# EAGLE board PCB_Gabri1.1.1 (EAGLE 8.6.3)
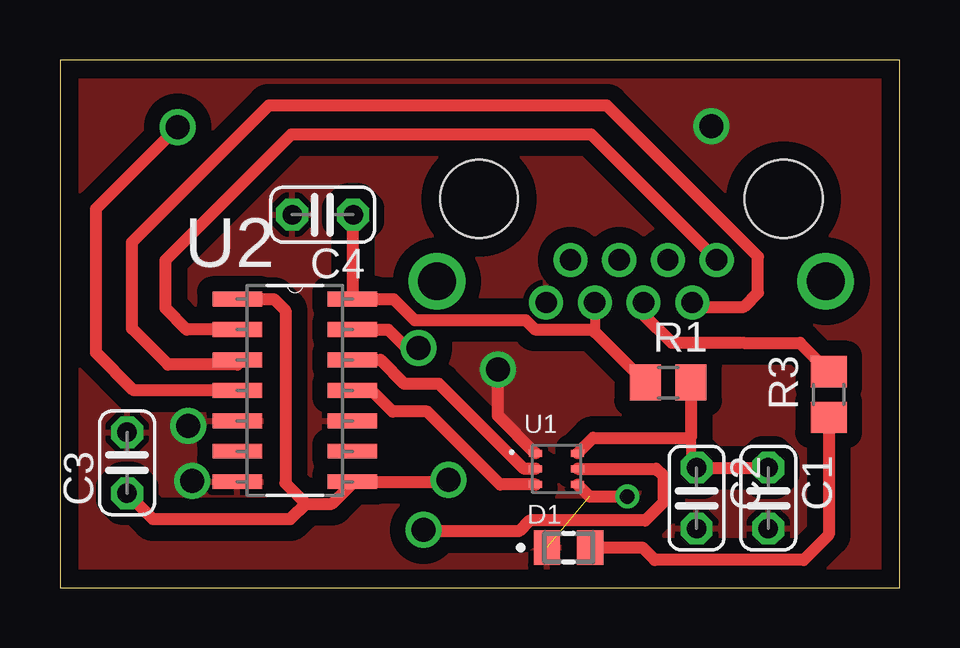
[diagram p0: board, top side]
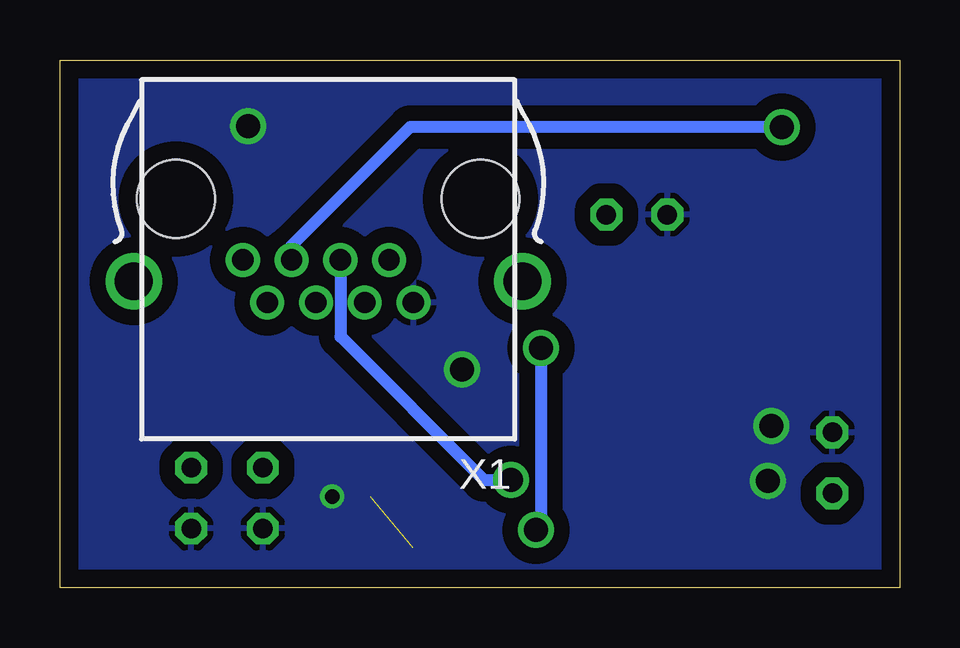
[diagram p1: board, bottom side, seen from below]

Size 35 x 22 mm. Coordinates in mm from the lower left corner, seen from the top.
Outline: 0,0 35,0 35,22 0,22 0,0
Copper layers (1*16): Top 0.035mm / dielectric 1.5mm / Bottom 0.035mm
Design rules "default *": minimum track width 10mil, minimum drill 0.5mm, track to track 0.65mm, track to pad 8mil, pad to pad 8mil, via to via 8mil, smd to smd 8mil, copper to edge 30mil, drill to drill 8mil, minimum pad ring 10mil, minimum via ring 8mil, stop-mask expansion 4mil, vias tented up to drill 0mil, thermal gap 10mil

## Footprints (pad centres in the part's own frame; a part is rotated, then mirrored left to right if it is on the bottom)
C025-024X044 = drill 0.813 octagon: 1 -1.27,0; 2 1.27,0
LEDC2012X70N = smd 1.1 x 1.45: A 0.9,0; C -0.9,0
R0805 = smd 1.3 x 1.5: 1 -0.95,0; 2 0.95,0
VISHAY_VEML6030_2X2X0.87 = smd 0.55 x 0.3: 1 -0.875,0.65; 2 -0.875,0; 3 -0.875,-0.65; 4 0.875,-0.65; 5 0.875,0; 6 0.875,0.65
SOIC127P600X175-14N = smd 2.057 x 0.61: 1 -4.801,7.62; 2 -4.801,6.35; 3 -4.801,5.08; 4 -4.801,3.81; 5 -4.801,2.54; 6 -4.801,1.27; 7 -4.801,0; 8 0,0; 9 0,1.27; 10 0,2.54; 11 0,3.81; 12 0,5.08; 13 0,6.35; 14 0,7.62
0446200002 = drill 0.889 pad 1.422: 1 3.556,2.54; 2 2.54,4.318; 3 1.524,2.54; 4 0.508,4.318; 5 -0.508,2.54; 6 -1.524,4.318; 7 -2.54,2.54; 8 -3.556,4.318 | drill 1.575 pad 2.286: S@1 -8.103,3.429; S@2 8.103,3.429 | hole 3.251: 6.35,0; -6.35,0

## Placement (x,y rotation side)
C1  [C025-024X044]  29.53,3.73 270 top
C2  [C025-024X044]  26.54,3.73 270 top
C3  [C025-024X044]  2.8,5.2 90 top
C4  [C025-024X044]  10.95,15.55 180 top
D1  5988170107F  [LEDC2012X70N]  21.2,1.67 0 top
R1  [R0805]  25.35,8.55 0 top
R3  [R0805]  32.05,8.05 90 top
U1  VEML6030  [VISHAY_VEML6030_2X2X0.87]  20.7,4.95 0 top
U2  TXS0104ED  [SOIC127P600X175-14N]  12.19,4.41 0 top
X1  0446200002  [0446200002]  23.82,16.2 180 bottom

## Library data of the parts
C1-C4 R1 R3 = resistor
D1 = 5988170107F; AVAILABILITY: Unavailable; DESCRIPTION: LED GREEN CLEAR 0805 SMD; MF: Dialight; MP: 5988170107F; PACKAGE: 0805 Dialight; PRICE: None
U1 = VEML6030; AVAILABILITY: Unavailable; DESCRIPTION: VEML6030 Series 2 x 2 x 0.85 mm 50 mW I2C High Accuracy Ambient Light Sensor; MF: Vishay; MP: VEML6030; PACKAGE: SMD-6 Vishay; PRICE: None
U2 = TXS0104ED; AVAILABILITY: Unavailable; DESCRIPTION: 4-Bit Bidirectional Voltage-Level Shifter for Open-Drain and Push-Pull Applications 14-SOIC -40 to 85; MF: Texas Instruments; MP: TXS0104ED; PACKAGE: SOIC-14 Texas Instruments; PRICE: None
X1 = 0446200002; AVAILABILITY: Unavailable; DESCRIPTION: Conn RJ-45 RCP 8 POS 2.04mm Solder RA Thru-Hole 8 Terminal 1 Port Tray Cat 3; MF: Molex, LLC; MP: 0446200002; PACKAGE: None; PRICE: None

## Nets
A1: U2.2 X1.1
A2: U2.3 X1.2
A3: U2.4 X1.3
GND: C1.2 C2.2 C3.2 C4.2 D1.C U1.1 U1.4 U2.5 U2.7 U2.10 X1.8
INT: U1.3 U2.11
LED_1: R3.2 X1.4
LED_2: D1.A R3.1
LS_VDD: C1.1 C2.1 R1.2 U1.6
SCL: U1.5 U2.13
SDA: U1.2 U2.12
VCCA: C3.1 U2.1 U2.8 X1.5
VCCB: C4.1 R1.1 U2.14 X1.6

## Tracks (layer width: path | path; a pad name or v marks a point on that pad's centre or on a via)
A1
  Top 0.508: U2.2 5.29,10.76 4.4,11.65 4.4,13.65 9.65,18.9 22.14,18.9 X1.1
A2
  Top 0.305: 7.39,9.3 U2.3
  Top 0.508: 7.39,9.3 4.5,9.3 3,10.8 3,14.4 8.7,20.1 22.8,20.1 29.1,13.8 29.1,12.3 28.5,11.7 26.4,11.7 26.4,11.84 X1.2
A3  (via drill 1)
  Top 0.508: v4.9,19.2 1.5,15.8 1.5,9.8 3.08,8.22 U2.4
  Bottom 0.406: 25.34,14.26 X1.3
  Bottom 0.508: v4.9,19.2 20.4,19.2 25.34,14.26
GND  (via drill 0.6, 1)  (1 unrouted)
  Top 0.508: U1.1 18.25,7.17 v18.25,9.1 | U1.4 22.08,3.8 v23.65,3.8
  other vias: 5.35,6.75 5.5,4.45 27.15,19.25
  pour Bottom: 0.25,21.75 0.25,0.35 34.7,0.35 34.7,21.75
  pour Top: 0.25,21.75 34.7,21.75 34.7,0.35 0.25,0.35 0.25,21.7
INT
  Top 0.508: U2.11 12.99,8.22 13.87,7.34 15.31,7.34 18.35,4.3 U1.3
LED_1
  Top 0.305: 28.5,10.2 28.35,10.2
  Top 0.508: 28.35,10.2 25.5,10.2 24.33,11.37 X1.4 | 28.5,10.2 30.85,10.2 R3.2
LED_2
  Top 0.508: D1.A 24.28,1.67 24.8,1.15 31,1.15 32.05,2.2 R3.1
LS_VDD
  Top 0.406: 26.3,6.25 26.3,5.24
  Top 0.508: R1.2 26.3,6.25 22.22,6.25 U1.6 | 26.3,5.24 C2.1 C1.1
SCL  (via drill 1)
  Top 0.508: v15.15,2.4 15.2,2.35 19.13,2.35 19.58,2.8 24.4,2.8 25.15,3.55 25.15,4.65 24.85,4.95 U1.5 | U2.13 13.68,10.76 14.44,10 v14.95,10
  Bottom 0.508: v14.95,10 14.95,2.6 v15.15,2.4
SDA
  Top 0.508: U2.12 13.36,9.49 14.35,8.5 15.8,8.5 19.35,4.95 U1.2
VCCA  (via drill 1)
  Top 0.305: 12.25,4.41 U2.8
  Top 0.406: 16.11,4.41 v16.2,4.5
  Top 0.508: 10.25,3.5 9.6,2.85 4.85,2.85 3.88,2.85 C3.1 | U2.1 8.92,12.03 9.4,11.55 9.4,4.35 10.25,3.5 | 10.25,3.5 11.34,3.5 12.25,4.41 | U2.8 16.11,4.41
  Bottom 0.508: v16.2,4.5 17.35,4.5 23.31,10.46 X1.5
VCCB
  Top 0.305: U2.14 12.22,12.06
  Top 0.406: X1.6 22.3,10.65 22.19,10.76
  Top 0.508: 22.3,10.65 R1.1 | 12.22,12.06 C4.1 | U2.14 13.91,12.03 14.79,11.15 18.7,11.15 19.42,11.15 19.8,10.76 22.19,10.76